# Altium PCB PCB.PcbDoc
Units mm, origin at the board's own origin, x right, y up, seen from the top; angles counter-clockwise.
Board outline 65 x 30 mm, 2 copper layers (Top Layer, Bottom Layer), stack 1.671 mm thick; 33 components, 28 nets, 188 pads, 32 vias.
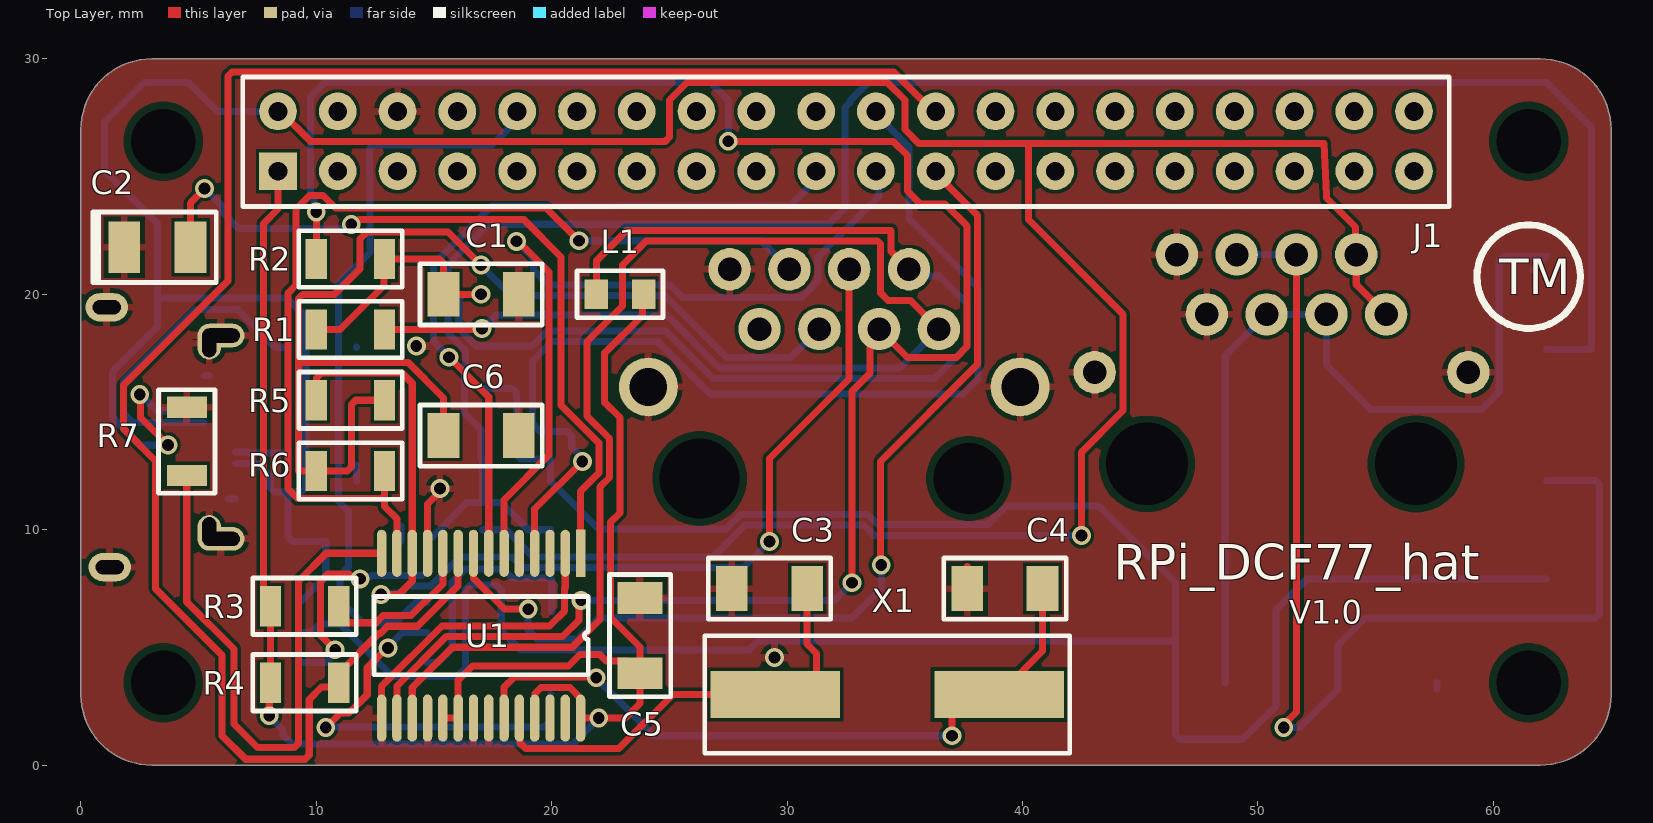
[diagram p0: Top Layer view]
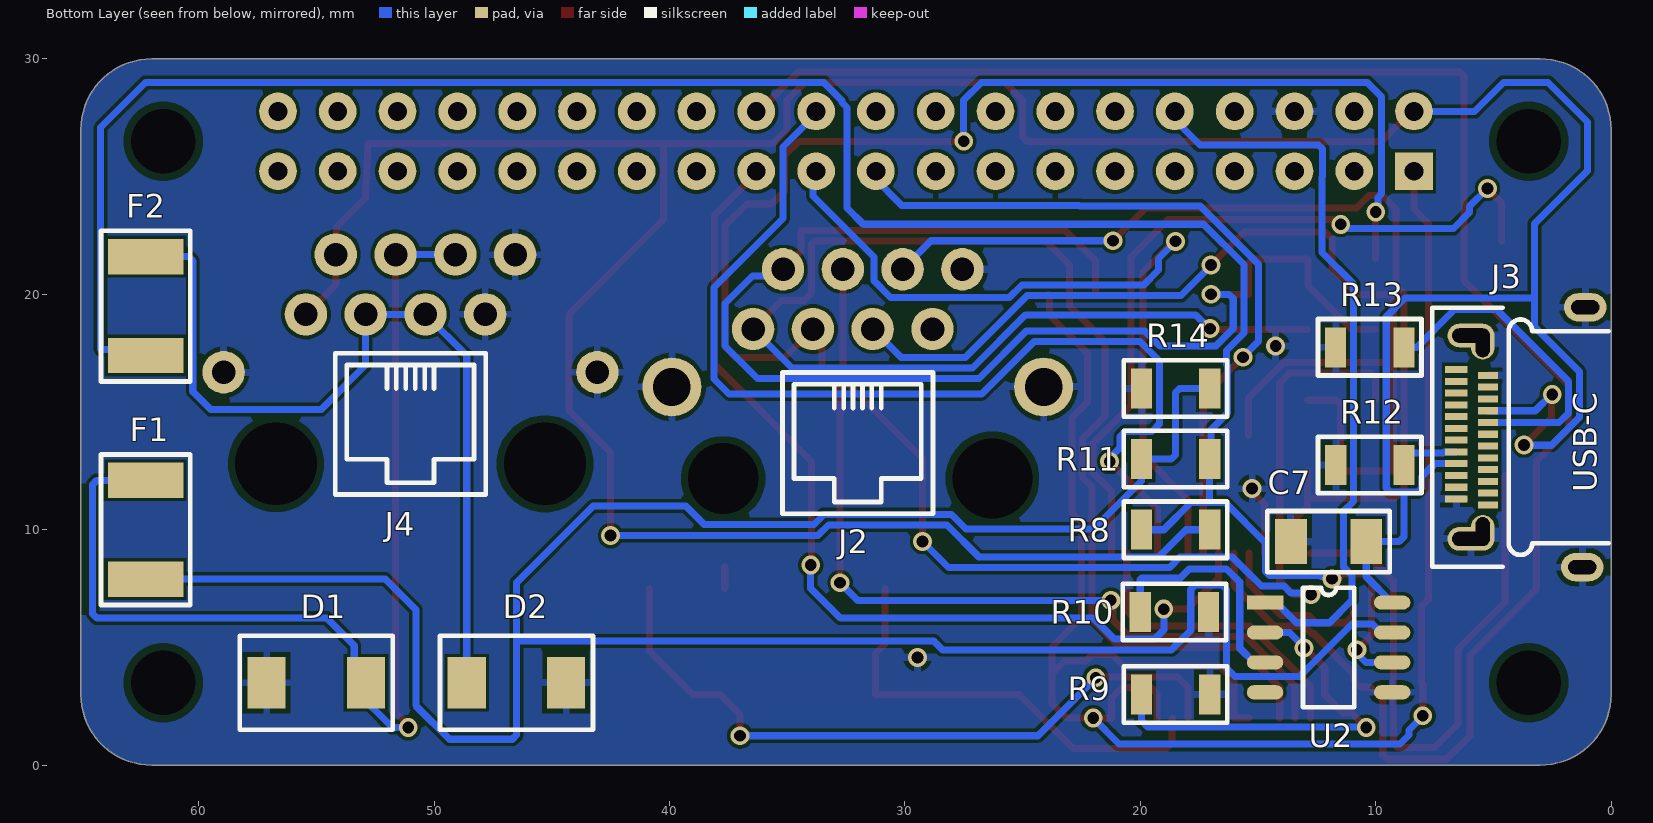
[diagram p1: Bottom Layer view, seen from below]
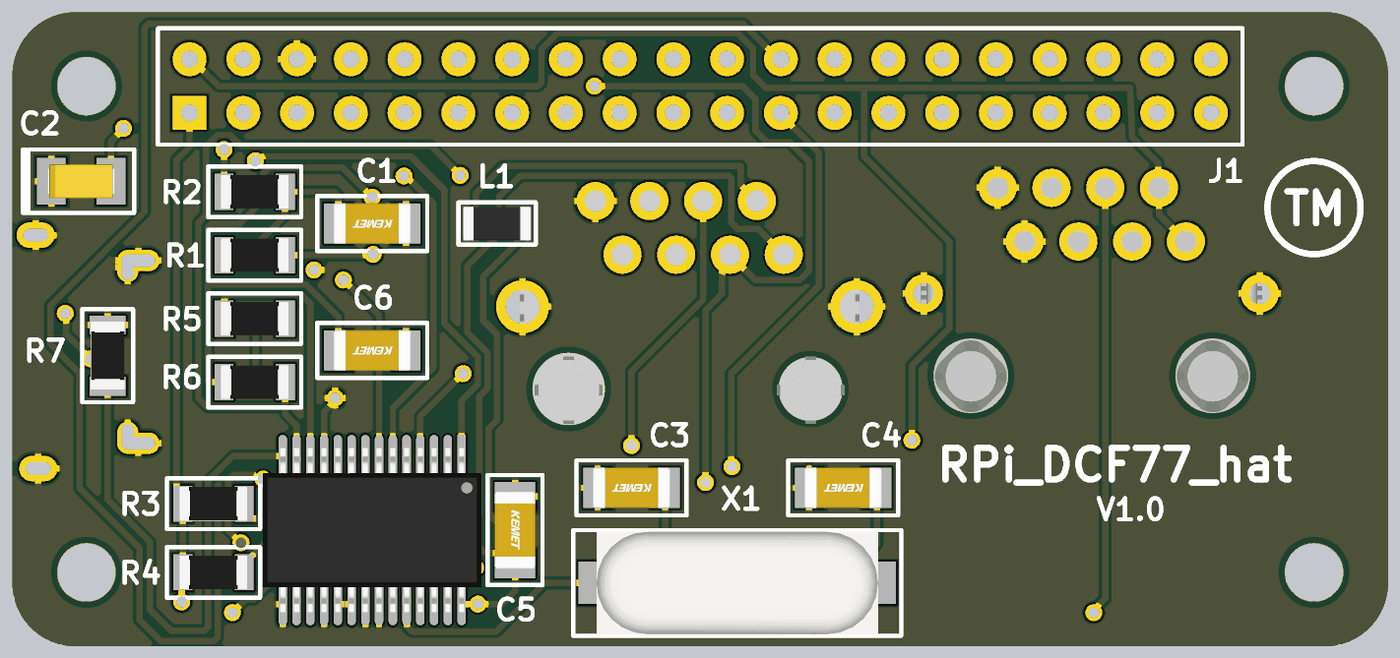
[diagram p2: 3D render of the assembled board from above, using the file's embedded part models]
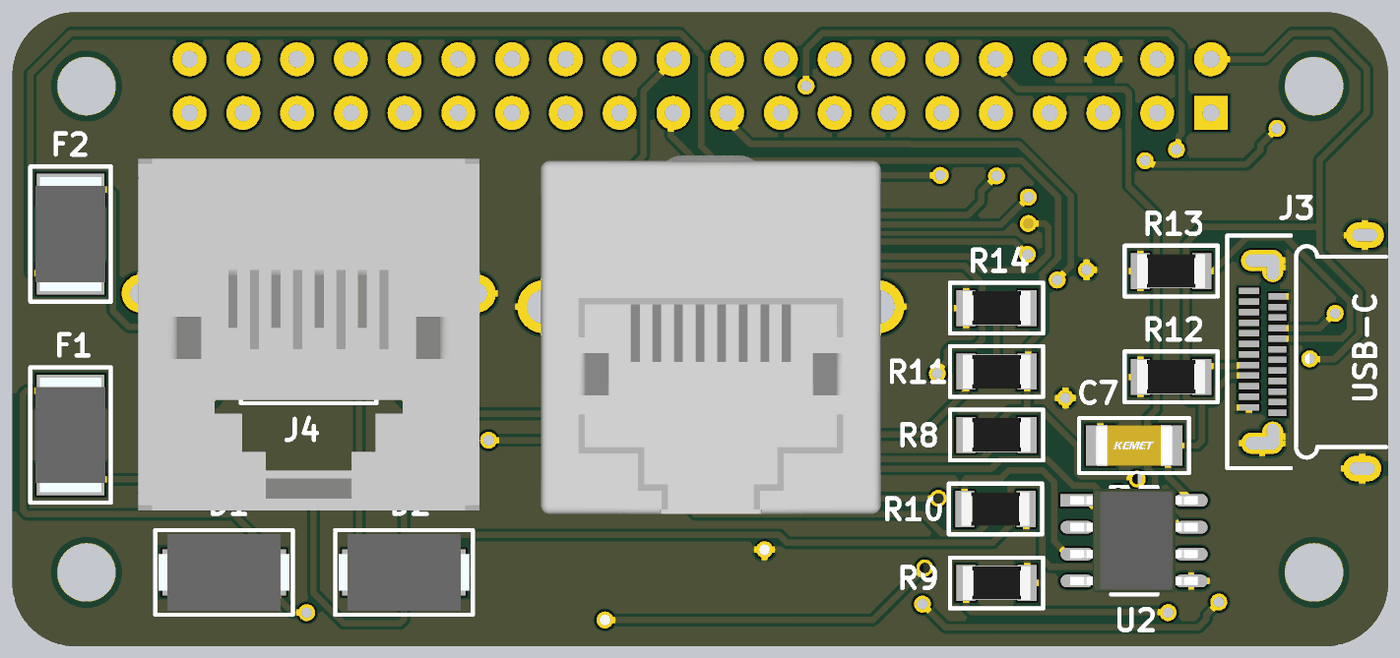
[diagram p3: 3D render of the assembled board from below, using the file's embedded part models]

## Layer stack, top to bottom
Top Solder: solder mask 0.0102, Solder Resist, Dk 3.5
Top Layer: signal copper 0.0356
Dielectric 1: dielectric 1.6, FR-4, Dk 4.8
Bottom Layer: signal copper 0.0356
Bottom Solder: solder mask 0.0102, Solder Resist, Dk 3.5

## Board outline
3,0 cw(c3,3) 0,3 0,27 cw(c3,27) 3,30 62,30 cw(c62,27) 65,27 65,3 cw(c62,3) 62,0

## Design rules (kind name [scope] priority, off if disabled: settings)
Clearance [All] p1: gap=0.15 ignorepadtopadclearanceinfootprint=FALSE except(0.3: Arc-Hole Track-Hole SMDPad-Hole THPad-Hole Via-Hole Fill-Hole Poly-Hole Region-Hole Text-Hole)
HoleSize [All] p1: absolutevalues=TRUE maxlimit=5 minlimit=0.025 maxpercent=80.000 minpercent=20.000
HoleToHoleClearance [All] p1: gap=0.5 allowstackedmicrovias=TRUE
MinimumSolderMaskSliver [InPadClass('All Pads')] p1: minsoldermaskwidth=0.127
PolygonConnect [All] p1: connectstyle=Relief reliefconductorwidth=0.3 reliefentries=4 polygonreliefangle="90 Angle" airgapwidth=0.2
RoutingVias [All] p1: holewidth=0.5 width=0.8 viastyle="Through Hole" minholewidth=0.5 minwidth=0.8 maxholewidth=0.5 maxwidth=0.8
SilkToSilkClearance [All] p1: silktosilkclearance=0.15
SilkToSolderMaskClearance [IsPad] p1: minsilkscreentomaskgap=0.127 clearancetoexposedcopper=TRUE
SolderMaskExpansion [All] p1: expansion=0.102 istentingtop=FALSE
Width [All] p1: maxlimit=0.3 minlimit=0.3 preferedwidth=0.3
25 further rules are at their usual default settings.

## Components (designator, comment, footprint, x,y, rotation, side; value= is the part's Value field where it differs from the comment)
C1 "Capacitator_MLCC" MLCC_capacitator 17,20 r180 top value=100nF
C2 "Capacitator_aluminium" Tantalum_capacitor 3.25,22 r0 top value=10uF
C3 "Capacitator_MLCC" MLCC_capacitator 29.25,7.5 r180 top value=C
C4 "Capacitator_MLCC" MLCC_capacitator 39.25,7.5 r180 top value=C
C5 "Capacitator_MLCC" MLCC_capacitator 23.75,5.5 r270 top value=100nF
C6 "Capacitator_MLCC" MLCC_capacitator 17,14 r180 top value=100nF
C7 "Capacitator_MLCC" MLCC_capacitator 12,9.5 r180 bottom value=100nF
D1 "SMP75" SMP75 55,3.5 r0 bottom
D2 "SMP75" SMP75 46.5,3.5 r180 bottom
F1 "PFMF.020.2" PFMF.020.2 62.25,10 r90 bottom
F2 "PFMF.020.2" PFMF.020.2 62.25,19.5 r90 bottom
J1 "20x2_header" 20X2_HEADER 32.5,26.5 r90 top
J2 "Ethernet_mag_connector" Ethernet_mag_connector 32,16.62 r180 bottom
J3 "USB_C_connector" USB_C_RIGHT_ANGLE 1.1,13.93 r90 bottom
J4 "Ethernet_connector" Ethernet_connector 51,15 r180 bottom
L1 "Ferrite_bead" FERRITE_BEAD 22.9,20 r0 top
R1 "Resistor" Resistor 11.45,18.5 r0 top value=49R9
R2 "Resistor" Resistor 11.45,21.5 r0 top value=49R9
R3 "Resistor" Resistor 9.5,6.75 r180 top value=10K
R4 "Resistor" Resistor 9.5,3.5 r180 top value=10K
R5 "Resistor" Resistor 11.45,15.5 r180 top value=49R9
R6 "Resistor" Resistor 11.45,12.5 r180 top value=49R9
R7 "Resistor" Resistor 4.5,13.75 r270 top value=2.32K
R8 "Resistor" Resistor 18.5,10 r180 bottom value=20k
R9 "Resistor" Resistor 18.5,3 r0 bottom value=10k
R10 "Resistor" Resistor 18.55,6.5 r0 bottom value=10k
R11 "Resistor" Resistor 18.5,13 r0 bottom value=120R
R12 "Resistor" Resistor 10.25,12.75 r180 bottom value=5k1
R13 "Resistor" Resistor 10.25,17.75 r180 bottom value=5k1
R14 "Resistor" Resistor 18.5,16 r180 bottom value=20k
U1 "ENC28J60" ENC28J60 17,5.5 r270 top
U2 "SN75176A" SN75176A 12,5 r180 bottom
X1 "Crystal_1" Crystal_25MHz 34.25,3 r180 top value=25MHz

## Footprints (in the part's own frame and the unit in brackets; to place one, negate y for a bottom-side part, rotate by r counter-clockwise, add the part's x,y. Pads: shape width x height; smd on the part's side, far side on the other; paste and mask are expansions set on the pad)
20X2_HEADER [mm]
  rect 1.6x1.6 / inner rect 2.5x1.2 / far side rect 1.6x1.6 hole 0.8: 1(-1.27,24.13)
  round 1.6 / inner oval 2.5x1.2 / far side round 1.6 hole 0.8: 2(1.27,24.13) 3(-1.27,21.59) 4(1.27,21.59) 5(-1.27,19.05) 6(1.27,19.05) 7(-1.27,16.51) 8(1.27,16.51) 9(-1.27,13.97) 10(1.27,13.97) 11(-1.27,11.43) 12(1.27,11.43) 13(-1.27,8.89) 14(1.27,8.89) 15(-1.27,6.35) 16(1.27,6.35) 17(-1.27,3.81) 18(1.27,3.81) 19(-1.27,1.27) 20(1.27,1.27) 21(-1.27,-1.27) 22(1.27,-1.27) 23(-1.27,-3.81) 24(1.27,-3.81) 25(-1.27,-6.35) 26(1.27,-6.35) 27(-1.27,-8.89) 28(1.27,-8.89) 29(-1.27,-11.43) 30(1.27,-11.43) 31(-1.27,-13.97) 32(1.27,-13.97) 33(-1.27,-16.51) 34(1.27,-16.51) 35(-1.27,-19.05) 36(1.27,-19.05) 37(-1.27,-21.59) 38(1.27,-21.59) 39(-1.27,-24.13) 40(1.27,-24.13)
  silkscreen extent -2.77,-25.62 2.73,25.63
Crystal_25MHz [mm]
  rect 5.5x2 smd: 1(-4.75,0) 2(4.75,0)
  silkscreen extent -7.75,-2.5 7.75,2.5, body extent -6.65,-2.43 6.65,2.42, height 3.2
ENC28J60 [mm]
  rect 2x0.4 smd: 1(-3.5,4.225)
  oval 2x0.4 smd: 2(-3.5,3.575) 3(-3.5,2.925) 4(-3.5,2.275) 5(-3.5,1.625) 6(-3.5,0.975) 7(-3.5,0.325) 8(-3.5,-0.325) 9(-3.5,-0.975) 10(-3.5,-1.625) 11(-3.5,-2.275) 12(-3.5,-2.925) 13(-3.5,-3.575) 14(-3.5,-4.225) 15(3.5,-4.225) 16(3.5,-3.575) 17(3.5,-2.925) 18(3.5,-2.275) 19(3.5,-1.625) 20(3.5,-0.975) 21(3.5,-0.325) 22(3.5,0.325) 23(3.5,0.975) 24(3.5,1.625) 25(3.5,2.275) 26(3.5,2.925) 27(3.5,3.575) 28(3.5,4.225)
  silkscreen extent -1.66,-4.55 1.67,4.55, body extent -3.88,-5.17 3.88,5.17, height 2.15
Ethernet_connector [mm]
  round 1.8 hole 1: 1(-4.445,4.15) 2(-3.175,6.69) 3(-1.905,4.15) 4(-0.635,6.69) 5(0.635,4.15) 6(1.905,6.69) 7(3.175,4.15) 8(4.445,6.69) 9(-7.935,1.69) 10(7.935,1.69)
  round 0 hole 3.5: 22(-5.715,-2.2) 22(5.715,-2.2)
  silkscreen extent -3.2,-3.5 3.2,2.5, body extent -8.06,-8.56 8.06,8.07, height 16.83
Ethernet_mag_connector [mm]
  round 1.8 hole 1: 1(-4.445,1.905) 2(-3.175,4.445) 3(-1.905,1.905) 4(-0.635,4.445) 5(0.635,1.905) 6(1.905,4.445) 7(3.175,1.905) 8(4.445,4.445)
  round 2.5 hole 1.6: 9(-7.895,-0.555) 10(7.895,-0.555)
  round 0 hole 3: 22(-5.715,-4.445)
  round 0 hole 3.4: 22(5.715,-4.445)
  silkscreen extent -3.2,-5.94 3.2,0.05, body extent -8.02,-10.35 8.03,6.6, height 16.91
FERRITE_BEAD [mm]
  rect 1x1.25 smd: 1(-1,0) 2(1,0)
  silkscreen extent -1.83,-1 1.83,1, body extent -1.6,-0.8 1.6,0.8, height 1.1
MLCC_capacitator [mm]
  rect 1.35x1.9 smd: 1(-1.6,0) 2(1.6,0)
  silkscreen extent -2.6,-1.3 2.6,1.3, body extent -1.85,-0.97 1.85,0.98, height 1.21
PFMF.020.2 [mm]
  rect 1.5x3.2 smd: 1(-2.1,0) 2(2.1,0)
  silkscreen extent -3.2,-1.9 3.2,1.9, body extent -2.7,-1.65 2.7,1.65, height 1.2
Resistor [mm]
  rect 0.9x1.7 smd: 1(-1.45,0) 2(1.45,0)
  silkscreen extent -2.2,-1.2 2.2,1.2, body extent -1.6,-0.8 1.6,0.8, height 0.56
SMP75 [mm]
  rect 1.62x2.18 smd: 1(-2.11,0) 2(2.11,0)
  silkscreen extent -3.25,-2 3.25,2, body extent -3.08,-1.81 3.09,1.81, height 2.75
SN75176A [mm]
  rect 1.55x0.6 smd: 1(-2.7,1.905)
  oval 1.55x0.6 smd: 2(-2.7,0.635) 3(-2.7,-0.635) 4(-2.7,-1.905) 5(2.7,-1.905) 6(2.7,-0.635) 7(2.7,0.635) 8(2.7,1.905)
  silkscreen extent -1.09,-2.54 1.09,2.54, body extent -3.01,-2.45 3.01,2.45, height 1.63
Tantalum_capacitor [mm]
  rect 1.35x2.2 smd: 1(-1.41,0) 2(1.41,0)
  silkscreen extent -2.75,-1.5 2.5,1.5, body extent -1.6,-0.8 1.6,0.8, height 1.8
USB_C_RIGHT_ANGLE [mm]
  rect 0.3x0.95 smd: A1(-2.625,5.475) A2(-2.125,5.475) A3(-1.625,5.475) A4(-1.125,5.475) A5(-0.625,5.475) A6(-0.125,5.475) A7(0.375,5.475) A8(0.875,5.475) A9(1.375,5.475) A10(1.875,5.475) A11(2.375,5.475) A12(2.875,5.475)
  rect 0.3x0.85 smd: B1(2.625,4.125) B2(2.125,4.125) B3(1.625,4.125) B4(1.125,4.125) B5(0.625,4.125) B6(0.125,4.125) B7(-0.375,4.125) B8(-0.875,4.125) B9(-1.375,4.125) B10(-1.875,4.125) B11(-2.375,4.125) B12(-2.875,4.125)
  oval 1.2x1.8 hole 1.2 slot 0.6 at 0 deg: S1(-5.52,0.125) S1(5.52,0)
  oval 1x2 hole 1.6 slot 0.6 at 0 deg: S1(-4.32,4.85) S1(4.32,4.85)
  oval 1.4x1 hole 0.6 slot 1.2 at 0 deg: S1(-4,4.35) S1(4,4.35)
  silkscreen extent -5.5,-1 5.5,6.5

## Part data
C1 C3 C4 C5 C6 C7: "MLCC capacitator - 1206"
C2: "Aluminum capacitator - filtration", Supplier Part Number 1=80-T491A106M010, Supplier 1=Mouser
D1 D2: "Bidirectional crowbar protection", Supplier Part Number 1=511-SMP75-8, Supplier 1=Mouser
F1 F2: "SMD fuse", Supplier Part Number 1=693-PFMF.020.2, Supplier 1=Mouser
J1: "40 position pin header", Supplier Part Number 1=200-CES12001TD, Supplier 1=Mouser
J2: "Ethernet magnetic connector", Supplier Part Number 1=571-5-2301995-2, Supplier 1=Mouser
J3: "USB type C"
J4: "Ethernet connector", Supplier Part Number 1=571-6368150-1, Supplier 1=Mouser
L1: "Multilayer Ferrite Bead", Supplier Part Number 1=70-ILB1206ER600V, Supplier 1=Mouser
R1 R2 R3 R4 R5 R6 R7 R8 R9 R10 R11 R12 R13 R14: "SMD resistor - 1206"
U1: "Stand-Alone Ethernet Controller with SPI Interface", Supplier Part Number 1=579-ENC28J60/SS, Supplier 1=Mouser
U2: "RS485 transreciever", Supplier Part Number 1=595-SN75176ADR, Supplier 1=Mouser
X1: "Quartz crystal 25MHz"

## Free pads (board coordinates)
  round 0 hole 2.75: 36(3.5,3.5) 36(3.5,26.5) 36(61.5,3.5) 36(61.5,26.5)

## Via types
v1: diameter 0.8, hole 0.5, Top Layer to Bottom Layer, 32 vias

## Nets (pads, with @x,y where several pads share a name; then routed paths per layer and width w, separated by ;. In a path a pad name is that pad's centre, name@x,y a point inside that pad or via, vN(x,y) a via of type N, cw(c..) or ccw(c..) an arc to the next point about the centre after c; other vN are vias at no path point)
3.3V: C5.2 J1.1 L1.2 R3.2 R4.2 U1.19 U1.20 U1.25 U1.28 | length 75.5
  Top Layer w0.3: v1(8,2.1) 8,3.45 R4.2 R3.2 7.75,7.05 7.75,7.626 7.75,23 8.37,23.62 J1.1 J1.1@8.5,25.1 ; U1.19 U1.20 16.025,3.607 16.635,4.216 20.718,4.216 21.202,4.7 22.04,4.7 22.315,4.425 23.225,4.425 C5.2 ; U1.25 19.294,2.019 19.294,3.048 19.546,3.3 20.782,3.3 21.075,3.007 21.075,2.977 21.225,2.827 21.225,1.981 21.244,2 v1(22,2) 23.128,2 23.75,2.622 C5.2 ; L1.2 23.851,19.951 23.851,19.101 22.25,17.5 22.25,15.411 22.9,14.761 22.9,10.718 22.5,10.318 22.5,6.275 23.75,5.025 C5.2
  Bottom Layer w0.3: v1(8,2.1) 8,2.077 8.589,1.487 8.589,1.275 8.965,0.9 20.9,0.9 v1(22,2)
GND: C1.1 C2.1 C3.2 C4.2 C5.1 C6.1 C7.1 D1.2 D2.2 J1.6 J2.8 J2.9 J2.10 J3.A1 J3.B1 J3.S1 J4.7 J4.8 J4.9 J4.10 R7.1 R9.1 R10.1 R12.1 R13.1 R14.1 U1.2 U1.11 U1.15 U1.18 U1.21 U1.22 U2.5 | length 22.2
  Top Layer w0.3: J3.S1@1.1,19.45 J3.S1@1.84,19.45 ; J3.S1@1.225,8.41 J3.S1@1.245,8.41 ; J3.S1@5.95,18.25 J3.S1@6.528,18.25 ; U1.15 12.775,3.349 15.335,5.909 19.909,5.909 20.55,6.55 20.55,7.525 20.575,7.55 U1.2 ; U1.11 14.725,11.09 15.25,11.615 v1(15.25,11.75) ; J2.10 J2.10@24.13,16.065 ; C4.2 C4.2@37.65,8.44
  Bottom Layer w0.3: J3.S1@1.1,19.45 J3.S1@1.245,19.45 ; J3.S1@1.225,8.41 J3.S1@1.245,8.41 ; J3.B1 J3.B1@5.45,16.555 ; J3.S1@5.45,9.93 5.95,9.61 J3.S1@6.248,9.61 ; J3.S1@5.45,17.93 5.77,18.25 J3.S1@5.95,18.25 ; J3.A1@6.248,11.305 J3.A1 ; R12.1@11.7,12.06 R12.1 ; R13.1 R13.1@11.7,17.755 ; C7.1 C7.1@13.6,10.16 ; v1@14.199,17.755 v1(14.249,17.805) ; v1@29.464,4.445 v1(29.464,4.572) ; D1.2@57.61,3.226 D1.2@57.61,3.5
NetC1_2: C1.2 J2.2 L1.1 R1.1 R2.2 | length 57.5
  Top Layer w0.3: R1.1 11,18.5 12.876,20.376 12.876,21.476 R2.2 15.224,21.5 15.4,21.324 C1.2 v1(17,20) ; L1.1 21.9,21.429 23.186,22.715 34.412,22.715 34.412,21.828 J2.2
  Bottom Layer w0.3: v1(17,20) 16.226,20 16.05,19.824 16.05,18.544 16.794,17.8 19.17,17.8 19.82,18.45 24.831,18.45 26.856,16.425 36.262,16.425 37.645,17.808 37.645,19.605 36.472,20.778 35.462,20.778 J2.2
NetC2_2: C2.2 U1.1 | length 32.9
  Top Layer w0.3: C2.2@4.66,22.25 4.66,23.888 5.25,24.478 v1(5.25,24.5) ; v1(11.483,22.973) 11.618,22.973 11.822,23.176 18.81,23.176 20.396,21.59 20.396,15.291 22,13.687 22,12.41 21.225,11.635 U1.1
  Bottom Layer w0.3: v1(5.25,24.5) 6.023,23.727 6.023,23.477 6.7,22.8 11.175,22.8 11.347,22.973 v1(11.483,22.973)
NetC3_1: C3.1 U1.24 X1.2 | length 19.4
  Top Layer w0.3: U1.24 18.644,1.981 18.644,0.952 18.896,0.7 22.846,0.7 25.146,3 X1.2 31.25,3 31.25,4.75 30.85,5.15 C3.1
NetC4_1: C4.1 U1.23 X1.1 | length 30.1
  Top Layer w0.3: U1.23 17.975,3.31 18.415,3.75 21.85,3.75 v1(21.888,3.713) ; v1(37,1.25) 37,2.15 37.85,3 X1.1 40.85,4.85 C4.1
  Bottom Layer w0.3: v1(21.888,3.713) 24.35,1.25 v1(37,1.25)
NetC6_2: C6.2 J2.5 R5.1 R6.2 | length 49.1
  Top Layer w0.3: 9.246,17.112 9.246,17 ; 9.25,17.004 9.25,17.112 9.25,17.526 9.25,19.824 9.426,20 10.764,20 11.851,21.087 11.851,22.351 12.15,22.65 15.6,22.65 v1(17,21.25) ; R5.1 11.676,15.5 11.5,15.324 11.5,12.676 11.324,12.5 R6.2 9.246,12.5 9.246,17 ; C6.2 15.4,15.6 13.888,17.112 9.358,17.112 9.246,17
  Bottom Layer w0.3: v1(17,21.25) 17,21.227 18.277,19.95 24.8,19.95 27.425,17.325 30.165,17.325 J2.5
NetD1_1: D1.1 F1.2 J4.4 J4.6 | length 47.2
  Top Layer w0.3: v1(51.096,1.596) 51.096,1.719 51.635,2.258 J4.4
  Bottom Layer w0.3: J4.6 J4.4 ; v1(51.096,1.596) 51.766,1.596 53.39,3.22 53.39,5.08 54.56,6.25 64.324,6.25 64.5,6.426 64.5,11.924 64.324,12.1 F1.2
NetD2_1: D2.1 F2.2 J4.3 J4.5 | length 37.9
  Bottom Layer w0.3: D2.1 48.61,17.395 J4.5 J4.3 52.905,16.996 54.788,15.113 59.487,15.113 60.25,15.876 60.25,21.424 60.426,21.6 F2.2 F2.2@61.689,21.039
NetF1_1: F1.1 R11.2 R14.2 U2.7 | length 107.8
  Bottom Layer w0.3: U2.7 9.775,5.635 10.14,6 11,6 13.241,3.759 15.977,3.759 16.332,4.115 16.332,7.456 16.526,7.65 17.674,7.65 17.856,7.468 17.856,5.715 18.671,4.9 28.402,4.9 28.774,5.272 46.478,5.272 46.5,5.25 ; R14.2 18.324,16 18.5,15.824 18.5,13.176 18.676,13 R11.2 19.95,12.065 21.99,10.025 27.4,10.025 28.025,10.65 33.436,10.65 33.861,10.225 38.523,10.225 39.298,11 43.25,11 46.5,7.75 46.5,5.25 ; F1.1 52.07,7.9 50.775,6.605 50.775,2.525 49.35,1.1 46.676,1.1 46.5,1.276 46.5,5.25
NetF2_1: F2.1 R8.1 R11.1 U2.6 | length 94.7
  Top Layer w0.3: v1(10.8,4.9) 10.185,5.515 10.185,7.824 10.472,8.111 11.389,8.111 11.491,8.009 11.757,8.009 v1(11.852,7.913)
  Bottom Layer w0.3: U2.6 10.408,4.365 10.704,4.661 10.704,4.804 v1(10.8,4.9) ; v1(11.852,7.913) 11.948,8.009 12.327,8.009 12.372,8.054 14.505,8.054 14.681,8.23 14.681,9.442 16.389,11.15 17.12,11.15 ; R8.1 19,10 17.85,11.15 17.12,11.15 ; F2.1@62.25,17.65 64.16,17.65 64.16,27.09 62.25,29 33.444,29 32.67,28.226 32.67,28.149 32.461,27.94 32.461,23.673 31.764,22.976 17.312,22.976 15.6,21.264 15.6,18.358 16.338,17.62 16.338,17.012 16.3,16.974 16.3,14.95 17,14.25 17,13.05 R11.1 17.05,11.219 17.12,11.15
NetJ1_10: J1.10 U2.1 | length 31.5
  Bottom Layer w0.3: U2.1 14.225,6.905 13.37,6.05 11.96,6.05 11,7.01 11,8.051 11.375,8.426 11.375,10.774 10.947,11.201 10.947,20.447 12.278,21.778 12.278,24.972 12.25,25 12.25,26.17 12.426,26.346 17.466,26.346 18.126,27.006 18.126,27.014 J1.10@18.652,27.54
NetJ1_19: J1.19 U1.7 | length 31.2
  Top Layer w0.3: v1(15.638,17.33) 17.325,15.643 U1.7
  Bottom Layer w0.3: v1(15.638,17.33) 15.638,17.35 14.986,18.001 14.986,21.286 17.45,23.75 22.582,23.75 22.606,23.774 30.134,23.774 J1.19@31.36,25
NetJ1_21: J1.21 U1.6 | length 34.6
  Top Layer w0.3: U1.6 17.975,11.269 19.888,13.183 19.888,20.955 18.593,22.25 v1(18.5,22.25)
  Bottom Layer w0.3: v1(18.5,22.25) 19.223,21.527 19.223,21.027 19.85,20.4 25.029,20.4 25.564,19.865 30.607,19.865 31.318,20.576 31.318,21.59 33.9,24.172 J1.21@33.9,25
NetJ1_22: J1.22 U1.4 | length 43.9
  Top Layer w0.3: U1.4 19.275,10.875 v1(21.3,12.9)
  Bottom Layer w0.3: v1(21.3,12.9) 21.3,13.035 20.85,13.486 20.85,13.961 20.637,14.173 19.507,14.173 19.177,14.503 19.177,17.17 20.007,18 24.504,18 26.731,15.773 26.847,15.773 37.465,15.773 38.1,16.408 38.1,20.292 35.176,23.216 35.176,26.264 J1.22@33.9,27.54
NetJ1_23: J1.23 U1.8 | length 40.8
  Top Layer w0.3: U1.8 16.675,7.938 17.986,6.626 v1(18.999,6.626) ; v1(34,8.5) 33.96,8.54 33.96,12.903 38.095,17.038 38.095,23.345 J1.23@36.44,25
  Bottom Layer w0.3: v1(18.999,6.626) 18.999,5.751 19.4,5.35 21.1,5.35 22,6.25 32.742,6.25 34,7.508 v1(34,8.5)
NetJ1_24: J1.24 R4.1 U1.9 | length 79.1
  Top Layer w0.3: U1.9 16.025,7.62 14.305,5.9 13.026,5.9 12.726,5.6 12.65,5.6 10.95,3.9 10.95,3.616 10.65,3.316 10.226,3.316 9.7,2.79 9.7,0.426 9.524,0.25 7,0.25 6,1.25 6,4.668 3.175,7.493 3.175,12.925 1.8,14.3 1.8,16.126 6.25,20.576 6.25,29.274 6.426,29.45 34.53,29.45 J1.24@36.44,27.54
NetJ2_1: J2.1 R1.2 U1.17 | length 68.8
  Top Layer w0.3: R1.2 12.905,18.505 17.005,18.505 v1(17.042,18.542) ; U1.17 14.075,3.302 15.782,5.009 20.874,5.009 22.05,6.184 22.05,11.824 22.45,12.224 22.45,13.873 21.5,14.823 21.5,18 23,19.5 23,21.25 24.015,22.265 33.833,22.265 33.96,22.138 33.96,20.066 34.29,19.736 35.234,19.736 J2.1
  Bottom Layer w0.3: v1(17.042,18.542) 17.067,18.542 17.656,19.13 24.87,19.13 27.125,16.875 34.795,16.875 J2.1
NetJ2_3: J2.3 R2.1 U1.16 | length 83.3
  Top Layer w0.3: R2.1 v1(10,23.5) ; U1.16 13.425,3.362 15.521,5.459 20.459,5.459 21.154,6.154 21.154,6.904 v1(21.25,7) ; v1(27.5,26.5) 34.5,26.5 35.107,25.893 35.107,24.393 35.656,23.844 36.712,23.844 37.645,22.911 37.645,17.78 37.188,17.323 35.107,17.323 J2.3 33.905,18.119 33.528,17.742 33.528,16.662 32.75,15.884 v1(32.75,7.75)
  Bottom Layer w0.3: v1(10,23.5) 9.904,23.596 9.904,24.119 9.75,24.274 9.75,28.394 10.356,29 26.75,29 27.5,28.25 v1(27.5,26.5) ; v1(21.25,7) 32,7 v1(32.75,7.75)
NetJ2_4: J2.4 R5.2 U1.12 | length 46
  Top Layer w0.3: R5.2 10,16.45 10.2,16.65 13.65,16.65 13.677,16.623 14.075,16.225 14.075,7.825 13.5,7.25 v1(12.75,7.25) ; v1(29.25,9.5) 29.25,13.021 32.635,16.406 J2.4
  Bottom Layer w0.3: v1(12.75,7.25) 12.804,7.304 13.6,7.304 13.9,7.604 14.856,7.604 15.627,8.376 16.091,8.839 18.311,8.839 18.75,8.4 28.15,8.4 v1(29.25,9.5)
NetJ2_6: J2.6 R6.1 U1.13 | length 42.5
  Top Layer w0.3: R6.1 12.9,11.328 ; U1.13 13.425,10.465 12.9,10.99 12.9,11.328 ; v1(21.158,22.276) 19.761,23.673 10.817,23.673 10.29,24.2 9.71,24.2 9.139,23.629 9.139,20.389 8.788,20.038 8.788,11.747 9.207,11.328 12.9,11.328
  Bottom Layer w0.3: v1(21.158,22.276) 28.884,22.276 J2.6
NetJ3_A5: J3.A5 R12.2 | length 2.8
  Bottom Layer w0.3: J3.A5 7.087,13.305 7.133,13.259 8.8,13.259 R12.2
NetJ3_B5: J3.B5 R13.2 | length 13.9
  Bottom Layer w0.3: J3.B5 3.583,14.555 3.578,14.55 2.21,14.55 1.8,14.96 1.8,16.3 4.855,19.355 6.645,19.355 8.25,17.75 R13.2
NetR3_1: R3.1 U1.10 | length 6.9
  Top Layer w0.3: R3.1 10.95,6.35 11.25,6.05 12.54,6.05 12.84,6.35 14.029,6.35 15.375,7.696 U1.10
NetR7_2: R7.2 U1.14 | length 25.5
  Top Layer w0.3: R7.2 4.496,12.3 4.496,6.934 6.5,4.93 6.5,1.75 7.5,0.75 9.074,0.75 9.25,0.926 9.25,7.828 10.422,9 U1.14
NetR9_2: R9.2 U2.2 | length 17.4
  Top Layer w0.3: v1(10.4,1.6) 11.02,2.22 11.394,2.22 12.162,2.988 12.162,4.136 13,4.974 v1(13.039,4.974)
  Bottom Layer w0.3: v1(10.4,1.6) 10.426,1.626 19.685,1.626 19.95,1.891 R9.2 ; v1(13.039,4.974) 13.039,5.013 13.661,5.635 U2.2
NetR10_2: R10.2 U2.3 | length 10.2
  Bottom Layer w0.3: U2.3 15.175,4.365 15.775,4.965 15.775,7.775 16.331,8.331 17.919,8.331 18.3,7.95 19.94,7.95 20,7.889 R10.2
VCC: C7.2 J1.2 J3.A4 J3.B4 J4.1 J4.2 R8.2 U2.8 | length 158.7
  Top Layer w0.3: v1(2.5,15.75) 2.535,15.715 2.535,14.765 v1(3.7,13.6) ; J1.2 8.48,27.77 9.75,26.5 24.824,26.5 25,26.676 25,28.25 25.75,29 34.25,29 35,28.25 35,27 35.584,26.416 40.25,26.416 ; v1(42.5,9.75) 42.5,13.29 44.272,15.062 44.272,19.152 40.25,23.174 40.25,26.416 ; J4.1 54.175,20.42 J4.2 54.136,21.729 54.136,22.864 52.99,24.01 52.907,24.093 52.902,24.209 52.807,26.416 40.25,26.416
  Bottom Layer w0.3: v1(2.5,15.75) 2.524,15.75 3.219,15.055 J3.B4 ; v1(3.7,13.6) 3.689,13.589 2.535,13.589 1.35,14.774 1.35,16.725 3.25,18.625 3.25,19.75 ; J3.A4 7.493,12.805 8.05,12.248 8.05,11.776 8.226,11.6 8.8,11.6 ; J1.2@8.14,27.54 J1.2@8.29,27.54 ; J1.2 5.797,27.77 4.567,29 2.683,29 1,27.317 1,25.25 3.25,23 3.25,19.75 ; U2.8 10.4,8.005 C7.2 9,9.5 8.8,9.7 8.8,11.6 ; R8.2 18.052,10 19.202,8.85 26.862,8.85 28.212,10.2 33.249,10.2 33.699,9.75 v1(42.5,9.75) ; 3.25,19.75 3.344,19.844 8.757,19.844 9.55,19.05 9.55,11.776 9.374,11.6 8.8,11.6
pads on no net: J1.3 J1.4 J1.5 J1.7 J1.8 J1.9 J1.11 J1.12 J1.13 J1.14 J1.15 J1.16 J1.17 J1.18 J1.20 J1.25 J1.26 J1.27 J1.28 J1.29 J1.30 J1.31 J1.32 J1.33 J1.34 J1.35 J1.36 J1.37 J1.38 J1.39 J1.40 J2.7 J2.22 J3.A2 J3.A3 J3.A6 J3.A7 J3.A8 J3.A9 J3.A10 J3.A11 J3.A12 J3.B2 J3.B3 J3.B6 J3.B7 J3.B8 J3.B9 J3.B10 J3.B11 J3.B12 J4.22 U1.3 U1.5 U1.26 U1.27 U2.4

## Polygon pours and split planes (outlines as drawn)
no net on Board_outline "NONET_L-01_P-001" (none): 0,3 0,27 cw(c3,27) 3,30 62,30 cw(c62,27) 65,27 65,3 cw(c62,3) 62,0 3,0 cw(c3,3)
GND on Bottom Layer "GND_L02_P003" (solid, pour order 3): 0,3 0,27 cw(c3,27) 3,30 62,30 cw(c62,27) 65,27 65,3 cw(c62,3) 62,0 3,0 cw(c3,3)
GND on Top Layer "GND_L01_P002" (solid, pour order 2): 0,3 0,27 cw(c3,27) 3,30 62,30 cw(c62,27) 65,27 65,3 cw(c62,3) 62,0 3,0 cw(c3,3)

## Silkscreen, mask and mechanical layers (free items; w line width, h text height)
Top Overlay:
  circle w0.3: c61.5,20.75 r2.2
  text "TM" at 60.25,20 h1.5
  text "RPi_DCF77_hat" at 43.878,7.875 h1.5
  text "V1.0" at 51.334,6 h1
Board_outline:
  the board outline again, w0.2

## Text inside footprints (layer, text, board x,y; h text height)
J3: Bottom Overlay "USB-C" at 0.6,11.597 h1 r270